# EAGLE board path_panel_na (EAGLE 7.2.0)
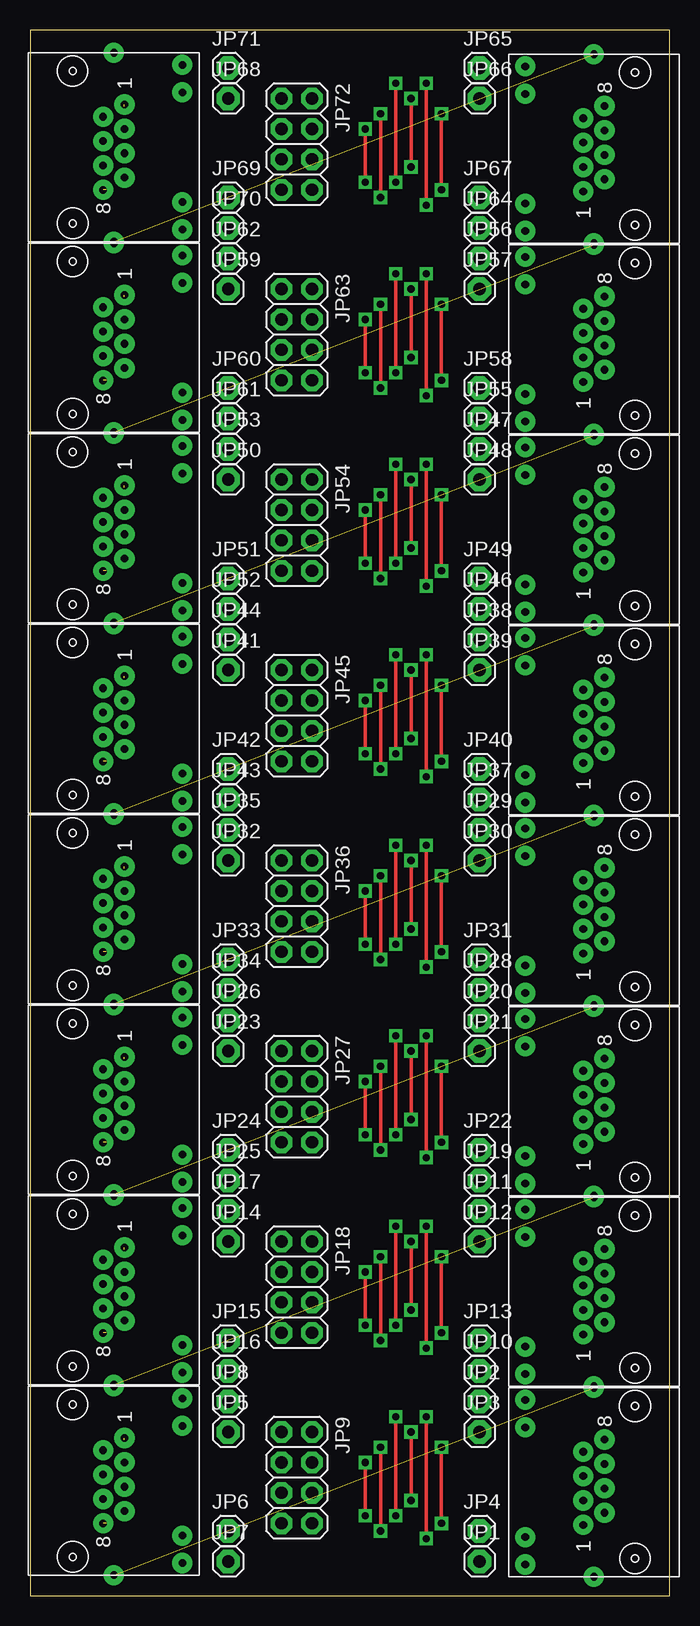
[diagram p0: board, top side]
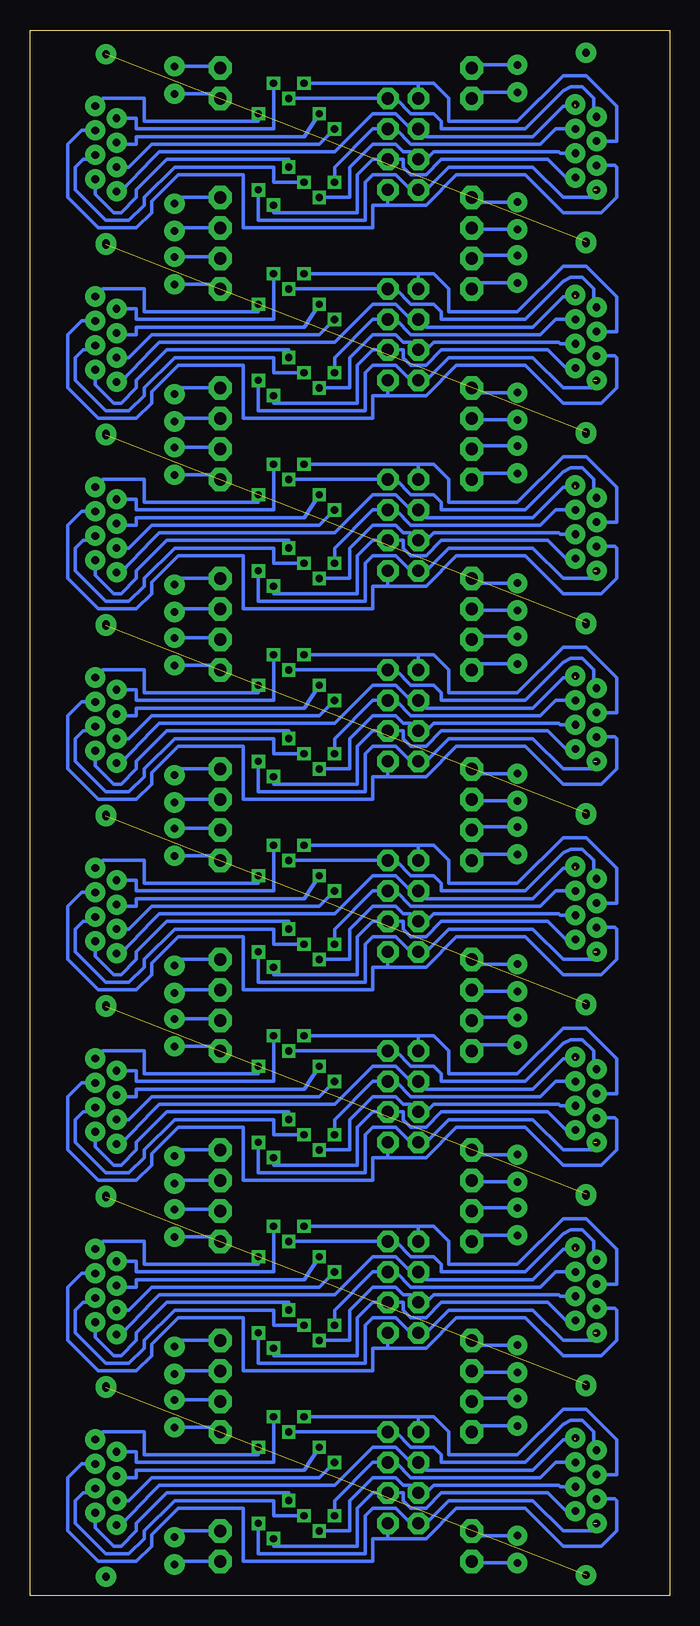
[diagram p1: board, bottom side, seen from below]

Size 53.32 x 130.48 mm. Coordinates in mm from the lower left corner, seen from the top.
Outline: 0,0 53.32,0 53.32,130.48 0,130.48 0,0
Copper layers (1*16): Top 0.035mm / dielectric 1.5mm / Bottom 0.035mm
Design rules "default *": minimum track width 10mil, minimum drill 24mil, track to track 8mil, track to pad 8mil, pad to pad 8mil, via to via 8mil, smd to smd 8mil, copper to edge 40mil, drill to drill 8mil, minimum pad ring 15mil, minimum via ring 10mil, stop-mask expansion 4mil, vias tented up to drill 0mil, thermal gap 10mil

## Footprints (pad centres in the part's own frame; a part is rotated, then mirrored left to right if it is on the bottom)
1X01 = drill 1.016 pad 1.93 octagon: 1 0,0
2X04 = drill 1.016 octagon: 1 -3.81,-1.27; 2 -3.81,1.27; 3 -1.27,-1.27; 4 -1.27,1.27; 5 1.27,-1.27; 6 1.27,1.27; 7 3.81,-1.27; 8 3.81,1.27
RJ-45_LEDS = drill 0.635 pad 1.676: G+ -9.525,4.826; G- -9.525,7.112; GND -3.81,-7.62; GND1 -3.81,8.128; P1 -4.699,-3.302; P2 -2.921,-2.286; P3 -4.699,-1.27; P4 -2.921,-0.254; P5 -4.699,0.762; P6 -2.921,1.778; P7 -4.699,2.794; P8 -2.921,3.81; Y+ -9.525,-6.604; Y- -9.525,-4.318

## Placement (x,y rotation side)
JP1  [1X01]  37.47,2.86 0 top
JP2  [1X01]  37.47,16.19 0 top
JP3  [1X01]  37.47,13.65 0 top
JP4  [1X01]  37.47,5.4 0 top
JP5  [1X01]  16.51,13.65 0 top
JP6  [1X01]  16.51,5.4 0 top
JP7  [1X01]  16.51,2.86 0 top
JP8  [1X01]  16.51,16.19 0 top
JP9  [2X04]  22.23,9.84 270 top
JP10  [1X01]  37.47,18.73 0 top
JP11  [1X01]  37.47,32.07 0 top
JP12  [1X01]  37.47,29.53 0 top
JP13  [1X01]  37.47,21.27 0 top
JP14  [1X01]  16.51,29.53 0 top
JP15  [1X01]  16.51,21.27 0 top
JP16  [1X01]  16.51,18.73 0 top
JP17  [1X01]  16.51,32.07 0 top
JP18  [2X04]  22.23,25.72 270 top
JP19  [1X01]  37.47,34.61 0 top
JP20  [1X01]  37.47,47.94 0 top
JP21  [1X01]  37.47,45.4 0 top
JP22  [1X01]  37.47,37.15 0 top
JP23  [1X01]  16.51,45.4 0 top
JP24  [1X01]  16.51,37.15 0 top
JP25  [1X01]  16.51,34.61 0 top
JP26  [1X01]  16.51,47.94 0 top
JP27  [2X04]  22.23,41.59 270 top
JP28  [1X01]  37.47,50.48 0 top
JP29  [1X01]  37.47,63.82 0 top
JP30  [1X01]  37.47,61.28 0 top
JP31  [1X01]  37.47,53.02 0 top
JP32  [1X01]  16.51,61.28 0 top
JP33  [1X01]  16.51,53.02 0 top
JP34  [1X01]  16.51,50.48 0 top
JP35  [1X01]  16.51,63.82 0 top
JP36  [2X04]  22.23,57.47 270 top
JP37  [1X01]  37.47,66.36 0 top
JP38  [1X01]  37.47,79.69 0 top
JP39  [1X01]  37.47,77.15 0 top
JP40  [1X01]  37.47,68.9 0 top
JP41  [1X01]  16.51,77.15 0 top
JP42  [1X01]  16.51,68.9 0 top
JP43  [1X01]  16.51,66.36 0 top
JP44  [1X01]  16.51,79.69 0 top
JP45  [2X04]  22.23,73.34 270 top
JP46  [1X01]  37.47,82.23 0 top
JP47  [1X01]  37.47,95.57 0 top
JP48  [1X01]  37.47,93.03 0 top
JP49  [1X01]  37.47,84.77 0 top
JP50  [1X01]  16.51,93.03 0 top
JP51  [1X01]  16.51,84.77 0 top
JP52  [1X01]  16.51,82.23 0 top
JP53  [1X01]  16.51,95.57 0 top
JP54  [2X04]  22.23,89.22 270 top
JP55  [1X01]  37.47,98.11 0 top
JP56  [1X01]  37.47,111.44 0 top
JP57  [1X01]  37.47,108.9 0 top
JP58  [1X01]  37.47,100.65 0 top
JP59  [1X01]  16.51,108.9 0 top
JP60  [1X01]  16.51,100.65 0 top
JP61  [1X01]  16.51,98.11 0 top
JP62  [1X01]  16.51,111.44 0 top
JP63  [2X04]  22.23,105.09 270 top
JP64  [1X01]  37.47,113.98 0 top
JP65  [1X01]  37.47,127.32 0 top
JP66  [1X01]  37.47,124.78 0 top
JP67  [1X01]  37.47,116.52 0 top
JP68  [1X01]  16.51,124.78 0 top
JP69  [1X01]  16.51,116.52 0 top
JP70  [1X01]  16.51,113.98 0 top
JP71  [1X01]  16.51,127.32 0 top
JP72  [2X04]  22.23,120.97 270 top
U$1  RJ-45_LEDS  [RJ-45_LEDS]  3.17,25.72 180 top
U$2  RJ-45_LEDS  [RJ-45_LEDS]  50.8,25.08 0 top
U$3  RJ-45_LEDS  [RJ-45_LEDS]  3.17,41.59 180 top
U$4  RJ-45_LEDS  [RJ-45_LEDS]  50.8,40.96 0 top
U$5  RJ-45_LEDS  [RJ-45_LEDS]  3.17,57.47 180 top
U$6  RJ-45_LEDS  [RJ-45_LEDS]  50.8,56.83 0 top
U$7  RJ-45_LEDS  [RJ-45_LEDS]  3.17,73.34 180 top
U$8  RJ-45_LEDS  [RJ-45_LEDS]  50.8,72.71 0 top
U$9  RJ-45_LEDS  [RJ-45_LEDS]  3.17,89.22 180 top
U$10  RJ-45_LEDS  [RJ-45_LEDS]  50.8,88.58 0 top
U$11  RJ-45_LEDS  [RJ-45_LEDS]  3.17,105.09 180 top
U$12  RJ-45_LEDS  [RJ-45_LEDS]  50.8,104.46 0 top
U$13  RJ-45_LEDS  [RJ-45_LEDS]  3.17,120.97 180 top
U$14  RJ-45_LEDS  [RJ-45_LEDS]  3.17,9.84 180 top
U$15  RJ-45_LEDS  [RJ-45_LEDS]  50.8,9.21 0 top
U$16  RJ-45_LEDS  [RJ-45_LEDS]  50.8,120.33 0 top

## Library data of the parts
JP1-JP8 JP10-JP17 JP19-JP26 JP28-JP35 JP37-JP44 JP46-JP53 JP55-JP62 JP64-JP71 = adafruit
JP9 JP18 JP27 JP36 JP45 JP54 JP63 JP72 = pinhead
U$1-U$16 = con-pc

## Nets
N$1: JP9.3 U$14.P1 U$15.P1
N$2: U$14.GND1 U$15.GND1
N$3: JP5.1 U$14.Y-
N$4: JP6.1 U$14.G+
N$5: JP7.1 U$14.G-
N$6: JP8.1 U$14.Y+
N$7: JP4.1 U$15.Y-
N$8: JP3.1 U$15.G+
N$9: JP2.1 U$15.G-
N$10: JP1.1 U$15.Y+
N$11: JP18.3 U$1.P1 U$2.P1
N$12: JP18.2 U$1.P2 U$2.P2
N$13: JP18.4 U$1.P3 U$2.P3
N$14: JP9.2 U$14.P2 U$15.P2
N$15: JP9.4 U$14.P3 U$15.P3
N$16: JP9.1 U$14.P4 U$15.P4
N$17: JP9.5 U$14.P5 U$15.P5
N$18: JP9.8 U$14.P6 U$15.P6
N$19: JP9.6 U$14.P7 U$15.P7
N$20: JP9.7 U$14.P8 U$15.P8
N$21: JP18.1 U$1.P4 U$2.P4
N$22: JP18.5 U$1.P5 U$2.P5
N$23: JP18.8 U$1.P6 U$2.P6
N$24: JP18.6 U$1.P7 U$2.P7
N$25: JP18.7 U$1.P8 U$2.P8
N$26: U$1.GND1 U$2.GND1
N$27: JP14.1 U$1.Y-
N$28: JP15.1 U$1.G+
N$29: JP16.1 U$1.G-
N$30: JP17.1 U$1.Y+
N$31: JP13.1 U$2.Y-
N$32: JP12.1 U$2.G+
N$33: JP11.1 U$2.G-
N$34: JP10.1 U$2.Y+
N$35: JP27.3 U$3.P1 U$4.P1
N$36: JP27.2 U$3.P2 U$4.P2
N$37: JP27.4 U$3.P3 U$4.P3
N$38: JP27.1 U$3.P4 U$4.P4
N$39: JP27.5 U$3.P5 U$4.P5
N$40: JP27.8 U$3.P6 U$4.P6
N$41: JP27.6 U$3.P7 U$4.P7
N$42: JP27.7 U$3.P8 U$4.P8
N$43: U$3.GND1 U$4.GND1
N$44: JP23.1 U$3.Y-
N$45: JP24.1 U$3.G+
N$46: JP25.1 U$3.G-
N$47: JP26.1 U$3.Y+
N$48: JP22.1 U$4.Y-
N$49: JP21.1 U$4.G+
N$50: JP20.1 U$4.G-
N$51: JP19.1 U$4.Y+
N$52: JP36.3 U$5.P1 U$6.P1
N$53: JP36.2 U$5.P2 U$6.P2
N$54: JP36.4 U$5.P3 U$6.P3
N$55: JP36.1 U$5.P4 U$6.P4
N$56: JP36.5 U$5.P5 U$6.P5
N$57: JP36.8 U$5.P6 U$6.P6
N$58: JP36.6 U$5.P7 U$6.P7
N$59: JP36.7 U$5.P8 U$6.P8
N$60: U$5.GND1 U$6.GND1
N$61: JP32.1 U$5.Y-
N$62: JP33.1 U$5.G+
N$63: JP34.1 U$5.G-
N$64: JP35.1 U$5.Y+
N$65: JP31.1 U$6.Y-
N$66: JP30.1 U$6.G+
N$67: JP29.1 U$6.G-
N$68: JP28.1 U$6.Y+
N$69: JP45.3 U$7.P1 U$8.P1
N$70: JP45.2 U$7.P2 U$8.P2
N$71: JP45.4 U$7.P3 U$8.P3
N$72: JP45.1 U$7.P4 U$8.P4
N$73: JP45.5 U$7.P5 U$8.P5
N$74: JP45.8 U$7.P6 U$8.P6
N$75: JP45.6 U$7.P7 U$8.P7
N$76: JP45.7 U$7.P8 U$8.P8
N$77: U$7.GND1 U$8.GND1
N$78: JP41.1 U$7.Y-
N$79: JP42.1 U$7.G+
N$80: JP43.1 U$7.G-
N$81: JP44.1 U$7.Y+
N$82: JP40.1 U$8.Y-
N$83: JP39.1 U$8.G+
N$84: JP38.1 U$8.G-
N$85: JP37.1 U$8.Y+
N$86: JP54.3 U$9.P1 U$10.P1
N$87: JP54.2 U$9.P2 U$10.P2
N$88: JP54.4 U$9.P3 U$10.P3
N$89: JP54.1 U$9.P4 U$10.P4
N$90: JP54.5 U$9.P5 U$10.P5
N$91: JP54.8 U$9.P6 U$10.P6
N$92: JP54.6 U$9.P7 U$10.P7
N$93: JP54.7 U$9.P8 U$10.P8
N$94: U$9.GND1 U$10.GND1
N$95: JP50.1 U$9.Y-
N$96: JP51.1 U$9.G+
N$97: JP52.1 U$9.G-
N$98: JP53.1 U$9.Y+
N$99: JP49.1 U$10.Y-
N$100: JP48.1 U$10.G+
N$101: JP47.1 U$10.G-
N$102: JP46.1 U$10.Y+
N$103: JP63.3 U$11.P1 U$12.P1
N$104: JP63.2 U$11.P2 U$12.P2
N$105: JP63.4 U$11.P3 U$12.P3
N$106: JP63.1 U$11.P4 U$12.P4
N$107: JP63.5 U$11.P5 U$12.P5
N$108: JP63.8 U$11.P6 U$12.P6
N$109: JP63.6 U$11.P7 U$12.P7
N$110: JP63.7 U$11.P8 U$12.P8
N$111: U$11.GND1 U$12.GND1
N$112: JP59.1 U$11.Y-
N$113: JP60.1 U$11.G+
N$114: JP61.1 U$11.G-
N$115: JP62.1 U$11.Y+
N$116: JP58.1 U$12.Y-
N$117: JP57.1 U$12.G+
N$118: JP56.1 U$12.G-
N$119: JP55.1 U$12.Y+
N$120: JP72.3 U$13.P1 U$16.P1
N$121: JP72.2 U$13.P2 U$16.P2
N$122: JP72.4 U$13.P3 U$16.P3
N$123: JP72.1 U$13.P4 U$16.P4
N$124: JP72.5 U$13.P5 U$16.P5
N$125: JP72.8 U$13.P6 U$16.P6
N$126: JP72.6 U$13.P7 U$16.P7
N$127: JP72.7 U$13.P8 U$16.P8
N$128: U$13.GND1 U$16.GND1
N$129: JP68.1 U$13.Y-
N$130: JP69.1 U$13.G+
N$131: JP70.1 U$13.G-
N$132: JP71.1 U$13.Y+
N$133: JP67.1 U$16.Y-
N$134: JP66.1 U$16.G+
N$135: JP65.1 U$16.G-
N$136: JP64.1 U$16.Y+

## Tracks (layer width: path | path; a pad name or v marks a point on that pad's centre or on a via)
N$1  (1 unrouted)
  Bottom 0.305: U$15.P1 45.72,5.91 43.18,8.57 42.55,9.21 27.94,9.21 24.77,12.38 22.86,12.38 21.59,11.11 JP9.3 20.32,10.48 11.43,10.48 8.89,13.02 7.87,13.02
N$2  (1 unrouted)
N$3
  Bottom 0.305: U$14.Y- 16,14.16 JP5.1
N$4
  Bottom 0.305: U$14.G+ 16.13,5.02 JP6.1
N$5
  Bottom 0.305: U$14.G- 16.38,2.73 JP7.1
N$6
  Bottom 0.305: U$14.Y+ 16.26,16.45 JP8.1
N$7
  Bottom 0.305: JP4.1 40.77,5.4 U$15.Y-
N$8
  Bottom 0.305: JP3.1 37.85,14.03 U$15.G+
N$9
  Bottom 0.305: JP2.1 37.59,16.32 U$15.G-
N$10
  Bottom 0.305: JP1.1 41.02,2.86 U$15.Y+
N$11  (1 unrouted)
  Bottom 0.305: U$2.P1 45.72,21.78 43.18,24.45 42.55,25.08 27.94,25.08 24.77,28.26 22.86,28.26 21.59,26.99 JP18.3 20.32,26.35 11.43,26.35 8.89,28.89 7.87,28.89
N$12  (via drill 0.6)
  Top 0.305: v31.75,29.53 v31.75,23.81
  Bottom 0.305: U$1.P2 6.35,28.26 6.35,29.53 7.3,30.48 8.26,30.48 8.89,30.16 12.06,26.99 19.05,26.99 19.05,27.62 19.68,28.26 21.59,28.26 22.86,29.53 JP18.2 v31.75,29.53 | v31.75,23.81 31.75,24.45 41.91,24.45 44.45,21.91 44.45,21.27 45.72,20 46.35,20 47.88,21.53 U$2.P2
N$13  (via drill 0.6)
  Top 0.305: v27.94,26.99 v27.94,22.54
  Bottom 0.305: U$2.P3 45.09,23.81 43.18,25.72 29.21,25.72 v27.94,26.99 | v27.94,22.54 27.94,23.81 24.77,26.99 JP18.4 22.86,26.99 21.59,25.72 10.79,25.72 9.53,26.99 U$1.P3
N$14  (via drill 0.6)
  Top 0.305: v31.75,13.65 v31.75,7.94
  Bottom 0.305: U$14.P2 6.35,12.38 6.35,13.65 7.3,14.61 8.26,14.61 8.89,14.29 12.06,11.11 19.05,11.11 19.05,11.75 19.68,12.38 21.59,12.38 22.86,13.65 JP9.2 v31.75,13.65 | v31.75,7.94 31.75,8.57 41.91,8.57 44.45,6.03 44.45,5.4 45.72,4.13 46.35,4.13 47.88,5.65 U$15.P2
N$15  (via drill 0.6)
  Top 0.305: v27.94,11.11 v27.94,6.67
  Bottom 0.305: U$15.P3 45.09,7.94 43.18,9.84 29.21,9.84 v27.94,11.11 | v27.94,6.67 27.94,7.94 24.77,11.11 JP9.4 22.86,11.11 21.59,9.84 10.79,9.84 9.53,11.11 U$14.P3
N$16  (via drill 0.6)
  Top 0.305: v30.48,14.92 v30.48,6.67
  Bottom 0.305: U$14.P4 4.45,10.1 4.45,13.02 6.99,15.56 8.89,15.56 12.7,11.75 18.41,11.75 18.41,13.65 19.68,14.92 20.95,14.92 | 20.95,14.92 v30.48,14.92 | U$15.P4 48.26,8.57 48.9,8.57 49.53,7.94 49.53,6.03 46.99,3.49 45.09,3.49 43.81,4.76 43.81,5.4 41.27,7.94 33.02,7.94 33.02,6.67 v30.48,6.67 | JP9.1 20.95,14.92
N$17  (via drill 0.6)
  Top 0.305: v29.21,12.38 v29.21,5.4
  Bottom 0.305: U$15.P5 45.97,9.84 44.45,9.84 44.45,10.48 30.48,10.48 v29.21,12.38 | v29.21,5.4 26.67,5.4 26.67,7.94 24.77,9.84 22.86,9.84 22.23,9.21 21.59,9.21 JP9.5 20.32,8.57 19.68,9.21 9.27,9.21 9.14,9.08 U$14.P5
N$18
  Bottom 0.305: U$14.P6 4.57,8.06 4.45,7.94 4.45,5.4 5.71,4.13 8.89,4.13 12.06,7.3 17.78,7.3 20.32,4.76 23.5,4.76 | 23.5,4.76 24.77,4.76 24.77,2.86 35.56,2.86 35.56,7.3 40.96,7.3 43.18,5.08 43.18,4.13 44.45,2.86 47.62,2.86 50.16,5.4 50.16,9.84 49.02,10.99 U$15.P6 | JP9.8 23.5,4.76
N$19  (via drill 0.6)
  Top 0.305: v33.02,14.92 v33.02,4.76
  Bottom 0.305: U$15.P7 44.45,12 44.45,11.11 33.02,11.11 v33.02,14.92 | v33.02,4.76 33.02,4.13 26.04,4.13 26.04,7.3 24.77,8.57 JP9.6 22.23,8.57 22.23,7.94 21.59,7.3 20.32,7.3 19.05,8.57 10.16,8.57 8.64,7.05 U$14.P7
N$20  (via drill 0.6)  (1 unrouted)
  Top 0.305: v34.29,6.03 v34.29,12.38
  Bottom 0.305: v34.29,6.03 34.29,3.49 25.4,3.49 25.4,6.67 24.77,7.3 22.86,7.3 21.59,6.03 JP9.7 20.32,6.03 18.41,7.94 11.43,7.94 8.89,5.4 6.35,5.4 6.35,6.03 | v34.29,12.38 34.29,11.75 43.81,11.75 43.81,13.65 47.24,13.65 U$15.P8
N$21  (via drill 0.6)
  Top 0.305: v30.48,30.8 v30.48,22.54
  Bottom 0.305: U$1.P4 4.45,25.97 4.45,28.89 6.99,31.43 8.89,31.43 12.7,27.62 18.41,27.62 18.41,29.53 19.68,30.8 20.95,30.8 | 20.95,30.8 v30.48,30.8 | U$2.P4 48.26,24.45 48.9,24.45 49.53,23.81 49.53,21.91 46.99,19.37 45.09,19.37 43.81,20.64 43.81,21.27 41.27,23.81 33.02,23.81 33.02,22.54 v30.48,22.54 | JP18.1 20.95,30.8
N$22  (via drill 0.6)
  Top 0.305: v29.21,28.26 v29.21,21.27
  Bottom 0.305: U$2.P5 45.97,25.72 44.45,25.72 44.45,26.35 30.48,26.35 v29.21,28.26 | v29.21,21.27 26.67,21.27 26.67,23.81 24.77,25.72 22.86,25.72 22.23,25.08 21.59,25.08 JP18.5 20.32,24.45 19.68,25.08 9.27,25.08 9.14,24.96 U$1.P5
N$23
  Bottom 0.305: U$1.P6 4.57,23.94 4.45,23.81 4.45,21.27 5.71,20 8.89,20 12.06,23.18 17.78,23.18 20.32,20.64 23.5,20.64 | 23.5,20.64 24.77,20.64 24.77,18.73 35.56,18.73 35.56,23.18 40.96,23.18 43.18,20.95 43.18,20 44.45,18.73 47.62,18.73 50.16,21.27 50.16,25.72 49.02,26.86 U$2.P6 | JP18.8 23.5,20.64
N$24  (via drill 0.6)
  Top 0.305: v33.02,30.8 v33.02,20.64
  Bottom 0.305: U$2.P7 44.45,27.88 44.45,26.99 33.02,26.99 v33.02,30.8 | v33.02,20.64 33.02,20 26.04,20 26.04,23.18 24.77,24.45 JP18.6 22.23,24.45 22.23,23.81 21.59,23.18 20.32,23.18 19.05,24.45 10.16,24.45 8.64,22.92 U$1.P7
N$25  (via drill 0.6)  (1 unrouted)
  Top 0.305: v34.29,21.91 v34.29,28.26
  Bottom 0.305: v34.29,21.91 34.29,19.37 25.4,19.37 25.4,22.54 24.77,23.18 22.86,23.18 21.59,21.91 JP18.7 20.32,21.91 18.41,23.81 11.43,23.81 8.89,21.27 6.35,21.27 6.35,21.91 | v34.29,28.26 34.29,27.62 43.81,27.62 43.81,29.53 47.24,29.53 U$2.P8
N$26  (1 unrouted)
N$27
  Bottom 0.305: U$1.Y- 16,30.04 JP14.1
N$28
  Bottom 0.305: U$1.G+ 16.13,20.89 JP15.1
N$29
  Bottom 0.305: U$1.G- 16.38,18.61 JP16.1
N$30
  Bottom 0.305: U$1.Y+ 16.26,32.32 JP17.1
N$31
  Bottom 0.305: JP13.1 40.77,21.27 U$2.Y-
N$32
  Bottom 0.305: JP12.1 37.85,29.91 U$2.G+
N$33
  Bottom 0.305: JP11.1 37.59,32.19 U$2.G-
N$34
  Bottom 0.305: JP10.1 41.02,18.73 U$2.Y+
N$35  (1 unrouted)
  Bottom 0.305: U$4.P1 45.72,37.66 43.18,40.32 42.55,40.96 27.94,40.96 24.77,44.13 22.86,44.13 21.59,42.86 JP27.3 20.32,42.23 11.43,42.23 8.89,44.77 7.87,44.77
N$36  (via drill 0.6)
  Top 0.305: v31.75,45.4 v31.75,39.69
  Bottom 0.305: U$3.P2 6.35,44.13 6.35,45.4 7.3,46.35 8.26,46.35 8.89,46.04 12.06,42.86 19.05,42.86 19.05,43.5 19.68,44.13 21.59,44.13 22.86,45.4 JP27.2 v31.75,45.4 | v31.75,39.69 31.75,40.32 41.91,40.32 44.45,37.78 44.45,37.15 45.72,35.88 46.35,35.88 47.88,37.4 U$4.P2
N$37  (via drill 0.6)
  Top 0.305: v27.94,42.86 v27.94,38.42
  Bottom 0.305: U$4.P3 45.09,39.69 43.18,41.59 29.21,41.59 v27.94,42.86 | v27.94,38.42 27.94,39.69 24.77,42.86 JP27.4 22.86,42.86 21.59,41.59 10.79,41.59 9.53,42.86 U$3.P3
N$38  (via drill 0.6)
  Top 0.305: v30.48,46.67 v30.48,38.42
  Bottom 0.305: U$3.P4 4.45,41.85 4.45,44.77 6.99,47.31 8.89,47.31 12.7,43.5 18.41,43.5 18.41,45.4 19.68,46.67 20.95,46.67 | 20.95,46.67 v30.48,46.67 | U$4.P4 48.26,40.32 48.9,40.32 49.53,39.69 49.53,37.78 46.99,35.24 45.09,35.24 43.81,36.51 43.81,37.15 41.27,39.69 33.02,39.69 33.02,38.42 v30.48,38.42 | JP27.1 20.95,46.67
N$39  (via drill 0.6)
  Top 0.305: v29.21,44.13 v29.21,37.15
  Bottom 0.305: U$4.P5 45.97,41.59 44.45,41.59 44.45,42.23 30.48,42.23 v29.21,44.13 | v29.21,37.15 26.67,37.15 26.67,39.69 24.77,41.59 22.86,41.59 22.23,40.96 21.59,40.96 JP27.5 20.32,40.32 19.68,40.96 9.27,40.96 9.14,40.83 U$3.P5
N$40
  Bottom 0.305: U$3.P6 4.57,39.81 4.45,39.69 4.45,37.15 5.71,35.88 8.89,35.88 12.06,39.05 17.78,39.05 20.32,36.51 23.5,36.51 | 23.5,36.51 24.77,36.51 24.77,34.61 35.56,34.61 35.56,39.05 40.96,39.05 43.18,36.83 43.18,35.88 44.45,34.61 47.62,34.61 50.16,37.15 50.16,41.59 49.02,42.74 U$4.P6 | JP27.8 23.5,36.51
N$41  (via drill 0.6)
  Top 0.305: v33.02,46.67 v33.02,36.51
  Bottom 0.305: U$4.P7 44.45,43.75 44.45,42.86 33.02,42.86 v33.02,46.67 | v33.02,36.51 33.02,35.88 26.04,35.88 26.04,39.05 24.77,40.32 JP27.6 22.23,40.32 22.23,39.69 21.59,39.05 20.32,39.05 19.05,40.32 10.16,40.32 8.64,38.8 U$3.P7
N$42  (via drill 0.6)  (1 unrouted)
  Top 0.305: v34.29,37.78 v34.29,44.13
  Bottom 0.305: v34.29,37.78 34.29,35.24 25.4,35.24 25.4,38.42 24.77,39.05 22.86,39.05 21.59,37.78 JP27.7 20.32,37.78 18.41,39.69 11.43,39.69 8.89,37.15 6.35,37.15 6.35,37.78 | v34.29,44.13 34.29,43.5 43.81,43.5 43.81,45.4 47.24,45.4 U$4.P8
N$43  (1 unrouted)
N$44
  Bottom 0.305: U$3.Y- 16,45.91 JP23.1
N$45
  Bottom 0.305: U$3.G+ 16.13,36.77 JP24.1
N$46
  Bottom 0.305: U$3.G- 16.38,34.48 JP25.1
N$47
  Bottom 0.305: U$3.Y+ 16.26,48.2 JP26.1
N$48
  Bottom 0.305: JP22.1 40.77,37.15 U$4.Y-
N$49
  Bottom 0.305: JP21.1 37.85,45.78 U$4.G+
N$50
  Bottom 0.305: JP20.1 37.59,48.07 U$4.G-
N$51
  Bottom 0.305: JP19.1 41.02,34.61 U$4.Y+
N$52  (1 unrouted)
  Bottom 0.305: U$6.P1 45.72,53.53 43.18,56.2 42.55,56.83 27.94,56.83 24.77,60.01 22.86,60.01 21.59,58.74 JP36.3 20.32,58.1 11.43,58.1 8.89,60.64 7.87,60.64
N$53  (via drill 0.6)
  Top 0.305: v31.75,61.28 v31.75,55.56
  Bottom 0.305: U$5.P2 6.35,60.01 6.35,61.28 7.3,62.23 8.26,62.23 8.89,61.91 12.06,58.74 19.05,58.74 19.05,59.37 19.68,60.01 21.59,60.01 22.86,61.28 JP36.2 v31.75,61.28 | v31.75,55.56 31.75,56.2 41.91,56.2 44.45,53.66 44.45,53.02 45.72,51.75 46.35,51.75 47.88,53.28 U$6.P2
N$54  (via drill 0.6)
  Top 0.305: v27.94,58.74 v27.94,54.29
  Bottom 0.305: U$6.P3 45.09,55.56 43.18,57.47 29.21,57.47 v27.94,58.74 | v27.94,54.29 27.94,55.56 24.77,58.74 JP36.4 22.86,58.74 21.59,57.47 10.79,57.47 9.53,58.74 U$5.P3
N$55  (via drill 0.6)
  Top 0.305: v30.48,62.55 v30.48,54.29
  Bottom 0.305: U$5.P4 4.45,57.72 4.45,60.64 6.99,63.18 8.89,63.18 12.7,59.37 18.41,59.37 18.41,61.28 19.68,62.55 20.95,62.55 | 20.95,62.55 v30.48,62.55 | U$6.P4 48.26,56.2 48.9,56.2 49.53,55.56 49.53,53.66 46.99,51.12 45.09,51.12 43.81,52.39 43.81,53.02 41.27,55.56 33.02,55.56 33.02,54.29 v30.48,54.29 | JP36.1 20.95,62.55
N$56  (via drill 0.6)
  Top 0.305: v29.21,60.01 v29.21,53.02
  Bottom 0.305: U$6.P5 45.97,57.47 44.45,57.47 44.45,58.1 30.48,58.1 v29.21,60.01 | v29.21,53.02 26.67,53.02 26.67,55.56 24.77,57.47 22.86,57.47 22.23,56.83 21.59,56.83 JP36.5 20.32,56.2 19.68,56.83 9.27,56.83 9.14,56.71 U$5.P5
N$57
  Bottom 0.305: U$5.P6 4.57,55.69 4.45,55.56 4.45,53.02 5.71,51.75 8.89,51.75 12.06,54.93 17.78,54.93 20.32,52.39 23.5,52.39 | 23.5,52.39 24.77,52.39 24.77,50.48 35.56,50.48 35.56,54.93 40.96,54.93 43.18,52.7 43.18,51.75 44.45,50.48 47.62,50.48 50.16,53.02 50.16,57.47 49.02,58.61 U$6.P6 | JP36.8 23.5,52.39
N$58  (via drill 0.6)
  Top 0.305: v33.02,62.55 v33.02,52.39
  Bottom 0.305: U$6.P7 44.45,59.63 44.45,58.74 33.02,58.74 v33.02,62.55 | v33.02,52.39 33.02,51.75 26.04,51.75 26.04,54.93 24.77,56.2 JP36.6 22.23,56.2 22.23,55.56 21.59,54.93 20.32,54.93 19.05,56.2 10.16,56.2 8.64,54.67 U$5.P7
N$59  (via drill 0.6)  (1 unrouted)
  Top 0.305: v34.29,53.66 v34.29,60.01
  Bottom 0.305: v34.29,53.66 34.29,51.12 25.4,51.12 25.4,54.29 24.77,54.93 22.86,54.93 21.59,53.66 JP36.7 20.32,53.66 18.41,55.56 11.43,55.56 8.89,53.02 6.35,53.02 6.35,53.66 | v34.29,60.01 34.29,59.37 43.81,59.37 43.81,61.28 47.24,61.28 U$6.P8
N$60  (1 unrouted)
N$61
  Bottom 0.305: U$5.Y- 16,61.78 JP32.1
N$62
  Bottom 0.305: U$5.G+ 16.13,52.64 JP33.1
N$63
  Bottom 0.305: U$5.G- 16.38,50.35 JP34.1
N$64
  Bottom 0.305: U$5.Y+ 16.26,64.07 JP35.1
N$65
  Bottom 0.305: JP31.1 40.77,53.02 U$6.Y-
N$66
  Bottom 0.305: JP30.1 37.85,61.66 U$6.G+
N$67
  Bottom 0.305: JP29.1 37.59,63.94 U$6.G-
N$68
  Bottom 0.305: JP28.1 41.02,50.48 U$6.Y+
N$69  (1 unrouted)
  Bottom 0.305: U$8.P1 45.72,69.41 43.18,72.07 42.55,72.71 27.94,72.71 24.77,75.88 22.86,75.88 21.59,74.61 JP45.3 20.32,73.98 11.43,73.98 8.89,76.52 7.87,76.52
N$70  (via drill 0.6)
  Top 0.305: v31.75,77.15 v31.75,71.44
  Bottom 0.305: U$7.P2 6.35,75.88 6.35,77.15 7.3,78.11 8.26,78.11 8.89,77.79 12.06,74.61 19.05,74.61 19.05,75.25 19.68,75.88 21.59,75.88 22.86,77.15 JP45.2 v31.75,77.15 | v31.75,71.44 31.75,72.07 41.91,72.07 44.45,69.53 44.45,68.9 45.72,67.63 46.35,67.63 47.88,69.15 U$8.P2
N$71  (via drill 0.6)
  Top 0.305: v27.94,74.61 v27.94,70.17
  Bottom 0.305: U$8.P3 45.09,71.44 43.18,73.34 29.21,73.34 v27.94,74.61 | v27.94,70.17 27.94,71.44 24.77,74.61 JP45.4 22.86,74.61 21.59,73.34 10.79,73.34 9.53,74.61 U$7.P3
N$72  (via drill 0.6)
  Top 0.305: v30.48,78.42 v30.48,70.17
  Bottom 0.305: U$7.P4 4.45,73.6 4.45,76.52 6.99,79.06 8.89,79.06 12.7,75.25 18.41,75.25 18.41,77.15 19.68,78.42 20.95,78.42 | 20.95,78.42 v30.48,78.42 | U$8.P4 48.26,72.07 48.9,72.07 49.53,71.44 49.53,69.53 46.99,66.99 45.09,66.99 43.81,68.26 43.81,68.9 41.27,71.44 33.02,71.44 33.02,70.17 v30.48,70.17 | JP45.1 20.95,78.42
N$73  (via drill 0.6)
  Top 0.305: v29.21,75.88 v29.21,68.9
  Bottom 0.305: U$8.P5 45.97,73.34 44.45,73.34 44.45,73.98 30.48,73.98 v29.21,75.88 | v29.21,68.9 26.67,68.9 26.67,71.44 24.77,73.34 22.86,73.34 22.23,72.71 21.59,72.71 JP45.5 20.32,72.07 19.68,72.71 9.27,72.71 9.14,72.58 U$7.P5
N$74
  Bottom 0.305: U$7.P6 4.57,71.56 4.45,71.44 4.45,68.9 5.71,67.63 8.89,67.63 12.06,70.8 17.78,70.8 20.32,68.26 23.5,68.26 | 23.5,68.26 24.77,68.26 24.77,66.36 35.56,66.36 35.56,70.8 40.96,70.8 43.18,68.58 43.18,67.63 44.45,66.36 47.62,66.36 50.16,68.9 50.16,73.34 49.02,74.49 U$8.P6 | JP45.8 23.5,68.26
N$75  (via drill 0.6)
  Top 0.305: v33.02,78.42 v33.02,68.26
  Bottom 0.305: U$8.P7 44.45,75.5 44.45,74.61 33.02,74.61 v33.02,78.42 | v33.02,68.26 33.02,67.63 26.04,67.63 26.04,70.8 24.77,72.07 JP45.6 22.23,72.07 22.23,71.44 21.59,70.8 20.32,70.8 19.05,72.07 10.16,72.07 8.64,70.55 U$7.P7
N$76  (via drill 0.6)  (1 unrouted)
  Top 0.305: v34.29,69.53 v34.29,75.88
  Bottom 0.305: v34.29,69.53 34.29,66.99 25.4,66.99 25.4,70.17 24.77,70.8 22.86,70.8 21.59,69.53 JP45.7 20.32,69.53 18.41,71.44 11.43,71.44 8.89,68.9 6.35,68.9 6.35,69.53 | v34.29,75.88 34.29,75.25 43.81,75.25 43.81,77.15 47.24,77.15 U$8.P8
N$77  (1 unrouted)
N$78
  Bottom 0.305: U$7.Y- 16,77.66 JP41.1
N$79
  Bottom 0.305: U$7.G+ 16.13,68.52 JP42.1
N$80
  Bottom 0.305: U$7.G- 16.38,66.23 JP43.1
N$81
  Bottom 0.305: U$7.Y+ 16.26,79.95 JP44.1
N$82
  Bottom 0.305: JP40.1 40.77,68.9 U$8.Y-
N$83
  Bottom 0.305: JP39.1 37.85,77.53 U$8.G+
N$84
  Bottom 0.305: JP38.1 37.59,79.82 U$8.G-
N$85
  Bottom 0.305: JP37.1 41.02,66.36 U$8.Y+
N$86  (1 unrouted)
  Bottom 0.305: U$10.P1 45.72,85.28 43.18,87.95 42.55,88.58 27.94,88.58 24.77,91.76 22.86,91.76 21.59,90.49 JP54.3 20.32,89.85 11.43,89.85 8.89,92.39 7.87,92.39
N$87  (via drill 0.6)
  Top 0.305: v31.75,93.03 v31.75,87.31
  Bottom 0.305: U$9.P2 6.35,91.76 6.35,93.03 7.3,93.98 8.26,93.98 8.89,93.66 12.06,90.49 19.05,90.49 19.05,91.12 19.68,91.76 21.59,91.76 22.86,93.03 JP54.2 v31.75,93.03 | v31.75,87.31 31.75,87.95 41.91,87.95 44.45,85.41 44.45,84.77 45.72,83.5 46.35,83.5 47.88,85.03 U$10.P2
N$88  (via drill 0.6)
  Top 0.305: v27.94,90.49 v27.94,86.04
  Bottom 0.305: U$10.P3 45.09,87.31 43.18,89.22 29.21,89.22 v27.94,90.49 | v27.94,86.04 27.94,87.31 24.77,90.49 JP54.4 22.86,90.49 21.59,89.22 10.79,89.22 9.53,90.49 U$9.P3
N$89  (via drill 0.6)
  Top 0.305: v30.48,94.3 v30.48,86.04
  Bottom 0.305: U$9.P4 4.45,89.47 4.45,92.39 6.99,94.93 8.89,94.93 12.7,91.12 18.41,91.12 18.41,93.03 19.68,94.3 20.95,94.3 | 20.95,94.3 v30.48,94.3 | U$10.P4 48.26,87.95 48.9,87.95 49.53,87.31 49.53,85.41 46.99,82.87 45.09,82.87 43.81,84.14 43.81,84.77 41.27,87.31 33.02,87.31 33.02,86.04 v30.48,86.04 | JP54.1 20.95,94.3
N$90  (via drill 0.6)
  Top 0.305: v29.21,91.76 v29.21,84.77
  Bottom 0.305: U$10.P5 45.97,89.22 44.45,89.22 44.45,89.85 30.48,89.85 v29.21,91.76 | v29.21,84.77 26.67,84.77 26.67,87.31 24.77,89.22 22.86,89.22 22.23,88.58 21.59,88.58 JP54.5 20.32,87.95 19.68,88.58 9.27,88.58 9.14,88.46 U$9.P5
N$91
  Bottom 0.305: U$9.P6 4.57,87.44 4.45,87.31 4.45,84.77 5.71,83.5 8.89,83.5 12.06,86.68 17.78,86.68 20.32,84.14 23.5,84.14 | 23.5,84.14 24.77,84.14 24.77,82.23 35.56,82.23 35.56,86.68 40.96,86.68 43.18,84.45 43.18,83.5 44.45,82.23 47.62,82.23 50.16,84.77 50.16,89.22 49.02,90.36 U$10.P6 | JP54.8 23.5,84.14
N$92  (via drill 0.6)
  Top 0.305: v33.02,94.3 v33.02,84.14
  Bottom 0.305: U$10.P7 44.45,91.38 44.45,90.49 33.02,90.49 v33.02,94.3 | v33.02,84.14 33.02,83.5 26.04,83.5 26.04,86.68 24.77,87.95 JP54.6 22.23,87.95 22.23,87.31 21.59,86.68 20.32,86.68 19.05,87.95 10.16,87.95 8.64,86.42 U$9.P7
N$93  (via drill 0.6)  (1 unrouted)
  Top 0.305: v34.29,85.41 v34.29,91.76
  Bottom 0.305: v34.29,85.41 34.29,82.87 25.4,82.87 25.4,86.04 24.77,86.68 22.86,86.68 21.59,85.41 JP54.7 20.32,85.41 18.41,87.31 11.43,87.31 8.89,84.77 6.35,84.77 6.35,85.41 | v34.29,91.76 34.29,91.12 43.81,91.12 43.81,93.03 47.24,93.03 U$10.P8
N$94  (1 unrouted)
N$95
  Bottom 0.305: U$9.Y- 16,93.53 JP50.1
N$96
  Bottom 0.305: U$9.G+ 16.13,84.39 JP51.1
N$97
  Bottom 0.305: U$9.G- 16.38,82.11 JP52.1
N$98
  Bottom 0.305: U$9.Y+ 16.26,95.82 JP53.1
N$99
  Bottom 0.305: JP49.1 40.77,84.77 U$10.Y-
N$100
  Bottom 0.305: JP48.1 37.85,93.41 U$10.G+
N$101
  Bottom 0.305: JP47.1 37.59,95.69 U$10.G-
N$102
  Bottom 0.305: JP46.1 41.02,82.23 U$10.Y+
N$103  (1 unrouted)
  Bottom 0.305: U$12.P1 45.72,101.16 43.18,103.82 42.55,104.46 27.94,104.46 24.77,107.63 22.86,107.63 21.59,106.36 JP63.3 20.32,105.73 11.43,105.73 8.89,108.27 7.87,108.27
N$104  (via drill 0.6)
  Top 0.305: v31.75,108.9 v31.75,103.19
  Bottom 0.305: U$11.P2 6.35,107.63 6.35,108.9 7.3,109.86 8.26,109.86 8.89,109.54 12.06,106.36 19.05,106.36 19.05,107 19.68,107.63 21.59,107.63 22.86,108.9 JP63.2 v31.75,108.9 | v31.75,103.19 31.75,103.82 41.91,103.82 44.45,101.28 44.45,100.65 45.72,99.38 46.35,99.38 47.88,100.9 U$12.P2
N$105  (via drill 0.6)
  Top 0.305: v27.94,106.36 v27.94,101.92
  Bottom 0.305: U$12.P3 45.09,103.19 43.18,105.09 29.21,105.09 v27.94,106.36 | v27.94,101.92 27.94,103.19 24.77,106.36 JP63.4 22.86,106.36 21.59,105.09 10.79,105.09 9.53,106.36 U$11.P3
N$106  (via drill 0.6)
  Top 0.305: v30.48,110.17 v30.48,101.92
  Bottom 0.305: U$11.P4 4.45,105.35 4.45,108.27 6.99,110.81 8.89,110.81 12.7,107 18.41,107 18.41,108.9 19.68,110.17 20.95,110.17 | 20.95,110.17 v30.48,110.17 | U$12.P4 48.26,103.82 48.9,103.82 49.53,103.19 49.53,101.28 46.99,98.74 45.09,98.74 43.81,100.01 43.81,100.65 41.27,103.19 33.02,103.19 33.02,101.92 v30.48,101.92 | JP63.1 20.95,110.17
N$107  (via drill 0.6)
  Top 0.305: v29.21,107.63 v29.21,100.65
  Bottom 0.305: U$12.P5 45.97,105.09 44.45,105.09 44.45,105.73 30.48,105.73 v29.21,107.63 | v29.21,100.65 26.67,100.65 26.67,103.19 24.77,105.09 22.86,105.09 22.23,104.46 21.59,104.46 JP63.5 20.32,103.82 19.68,104.46 9.27,104.46 9.14,104.33 U$11.P5
N$108
  Bottom 0.305: U$11.P6 4.57,103.31 4.45,103.19 4.45,100.65 5.71,99.38 8.89,99.38 12.06,102.55 17.78,102.55 20.32,100.01 23.5,100.01 | 23.5,100.01 24.77,100.01 24.77,98.11 35.56,98.11 35.56,102.55 40.96,102.55 43.18,100.33 43.18,99.38 44.45,98.11 47.62,98.11 50.16,100.65 50.16,105.09 49.02,106.24 U$12.P6 | JP63.8 23.5,100.01
N$109  (via drill 0.6)
  Top 0.305: v33.02,110.17 v33.02,100.01
  Bottom 0.305: U$12.P7 44.45,107.25 44.45,106.36 33.02,106.36 v33.02,110.17 | v33.02,100.01 33.02,99.38 26.04,99.38 26.04,102.55 24.77,103.82 JP63.6 22.23,103.82 22.23,103.19 21.59,102.55 20.32,102.55 19.05,103.82 10.16,103.82 8.64,102.3 U$11.P7
N$110  (via drill 0.6)  (1 unrouted)
  Top 0.305: v34.29,101.28 v34.29,107.63
  Bottom 0.305: v34.29,101.28 34.29,98.74 25.4,98.74 25.4,101.92 24.77,102.55 22.86,102.55 21.59,101.28 JP63.7 20.32,101.28 18.41,103.19 11.43,103.19 8.89,100.65 6.35,100.65 6.35,101.28 | v34.29,107.63 34.29,107 43.81,107 43.81,108.9 47.24,108.9 U$12.P8
N$111  (1 unrouted)
N$112
  Bottom 0.305: U$11.Y- 16,109.41 JP59.1
N$113
  Bottom 0.305: U$11.G+ 16.13,100.27 JP60.1
N$114
  Bottom 0.305: U$11.G- 16.38,97.98 JP61.1
N$115
  Bottom 0.305: U$11.Y+ 16.26,111.7 JP62.1
N$116
  Bottom 0.305: JP58.1 40.77,100.65 U$12.Y-
N$117
  Bottom 0.305: JP57.1 37.85,109.28 U$12.G+
N$118
  Bottom 0.305: JP56.1 37.59,111.57 U$12.G-
N$119
  Bottom 0.305: JP55.1 41.02,98.11 U$12.Y+
N$120  (1 unrouted)
  Bottom 0.305: U$16.P1 45.72,117.03 43.18,119.7 42.55,120.33 27.94,120.33 24.77,123.51 22.86,123.51 21.59,122.24 JP72.3 20.32,121.6 11.43,121.6 8.89,124.14 7.87,124.14
N$121  (via drill 0.6)
  Top 0.305: v31.75,124.78 v31.75,119.06
  Bottom 0.305: U$13.P2 6.35,123.51 6.35,124.78 7.3,125.73 8.26,125.73 8.89,125.41 12.06,122.24 19.05,122.24 19.05,122.87 19.68,123.51 21.59,123.51 22.86,124.78 JP72.2 v31.75,124.78 | v31.75,119.06 31.75,119.7 41.91,119.7 44.45,117.16 44.45,116.52 45.72,115.25 46.35,115.25 47.88,116.78 U$16.P2
N$122  (via drill 0.6)
  Top 0.305: v27.94,122.24 v27.94,117.79
  Bottom 0.305: U$16.P3 45.09,119.06 43.18,120.97 29.21,120.97 v27.94,122.24 | v27.94,117.79 27.94,119.06 24.77,122.24 JP72.4 22.86,122.24 21.59,120.97 10.79,120.97 9.53,122.24 U$13.P3
N$123  (via drill 0.6)
  Top 0.305: v30.48,126.05 v30.48,117.79
  Bottom 0.305: U$13.P4 4.45,121.22 4.45,124.14 6.99,126.68 8.89,126.68 12.7,122.87 18.41,122.87 18.41,124.78 19.68,126.05 20.95,126.05 | 20.95,126.05 v30.48,126.05 | U$16.P4 48.26,119.7 48.9,119.7 49.53,119.06 49.53,117.16 46.99,114.62 45.09,114.62 43.81,115.89 43.81,116.52 41.27,119.06 33.02,119.06 33.02,117.79 v30.48,117.79 | JP72.1 20.95,126.05
N$124  (via drill 0.6)
  Top 0.305: v29.21,123.51 v29.21,116.52
  Bottom 0.305: U$16.P5 45.97,120.97 44.45,120.97 44.45,121.6 30.48,121.6 v29.21,123.51 | v29.21,116.52 26.67,116.52 26.67,119.06 24.77,120.97 22.86,120.97 22.23,120.33 21.59,120.33 JP72.5 20.32,119.7 19.68,120.33 9.27,120.33 9.14,120.21 U$13.P5
N$125
  Bottom 0.305: U$13.P6 4.57,119.19 4.45,119.06 4.45,116.52 5.71,115.25 8.89,115.25 12.06,118.43 17.78,118.43 20.32,115.89 23.5,115.89 | 23.5,115.89 24.77,115.89 24.77,113.98 35.56,113.98 35.56,118.43 40.96,118.43 43.18,116.2 43.18,115.25 44.45,113.98 47.62,113.98 50.16,116.52 50.16,120.97 49.02,122.11 U$16.P6 | JP72.8 23.5,115.89
N$126  (via drill 0.6)
  Top 0.305: v33.02,126.05 v33.02,115.89
  Bottom 0.305: U$16.P7 44.45,123.13 44.45,122.24 33.02,122.24 v33.02,126.05 | v33.02,115.89 33.02,115.25 26.04,115.25 26.04,118.43 24.77,119.7 JP72.6 22.23,119.7 22.23,119.06 21.59,118.43 20.32,118.43 19.05,119.7 10.16,119.7 8.64,118.17 U$13.P7
N$127  (via drill 0.6)  (1 unrouted)
  Top 0.305: v34.29,117.16 v34.29,123.51
  Bottom 0.305: v34.29,117.16 34.29,114.62 25.4,114.62 25.4,117.79 24.77,118.43 22.86,118.43 21.59,117.16 JP72.7 20.32,117.16 18.41,119.06 11.43,119.06 8.89,116.52 6.35,116.52 6.35,117.16 | v34.29,123.51 34.29,122.87 43.81,122.87 43.81,124.78 47.24,124.78 U$16.P8
N$128  (1 unrouted)
N$129
  Bottom 0.305: U$13.Y- 16,125.28 JP68.1
N$130
  Bottom 0.305: U$13.G+ 16.13,116.14 JP69.1
N$131
  Bottom 0.305: U$13.G- 16.38,113.86 JP70.1
N$132
  Bottom 0.305: U$13.Y+ 16.26,127.57 JP71.1
N$133
  Bottom 0.305: JP67.1 40.77,116.52 U$16.Y-
N$134
  Bottom 0.305: JP66.1 37.85,125.16 U$16.G+
N$135
  Bottom 0.305: JP65.1 37.59,127.44 U$16.G-
N$136
  Bottom 0.305: JP64.1 41.02,113.98 U$16.Y+